# Altium PCB First32.PcbDoc
Units mil, origin at the board's own origin, x right, y up, seen from the top; angles counter-clockwise.
Board outline 1980 x 1970 mil, 2 copper layers (Top Layer, Bottom Layer); 42 components, 70 nets, 235 pads, 75 vias.
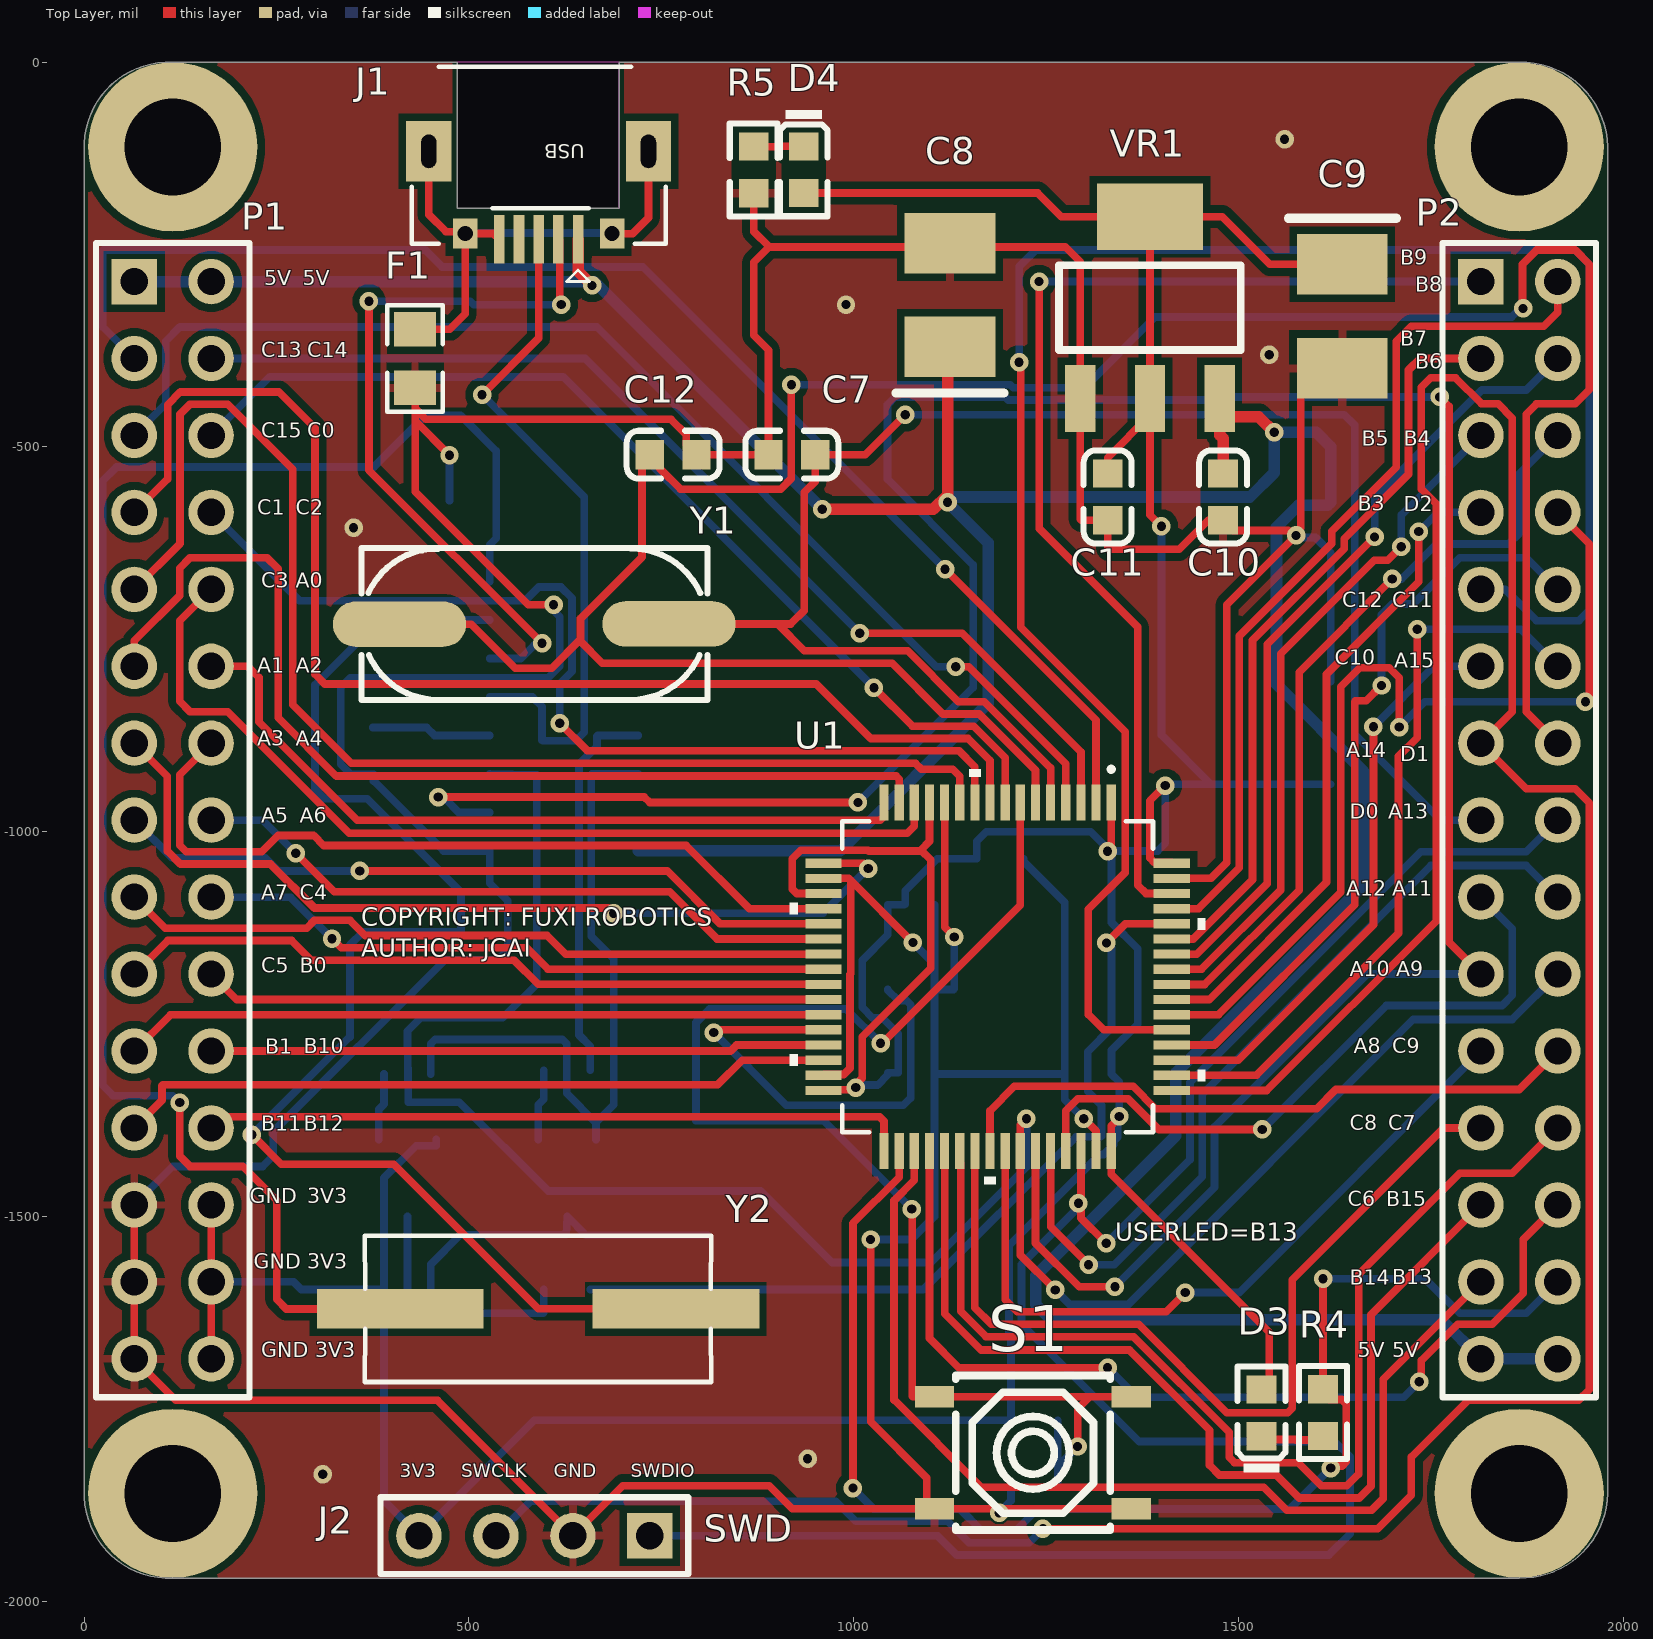
[diagram p0: Top Layer view]
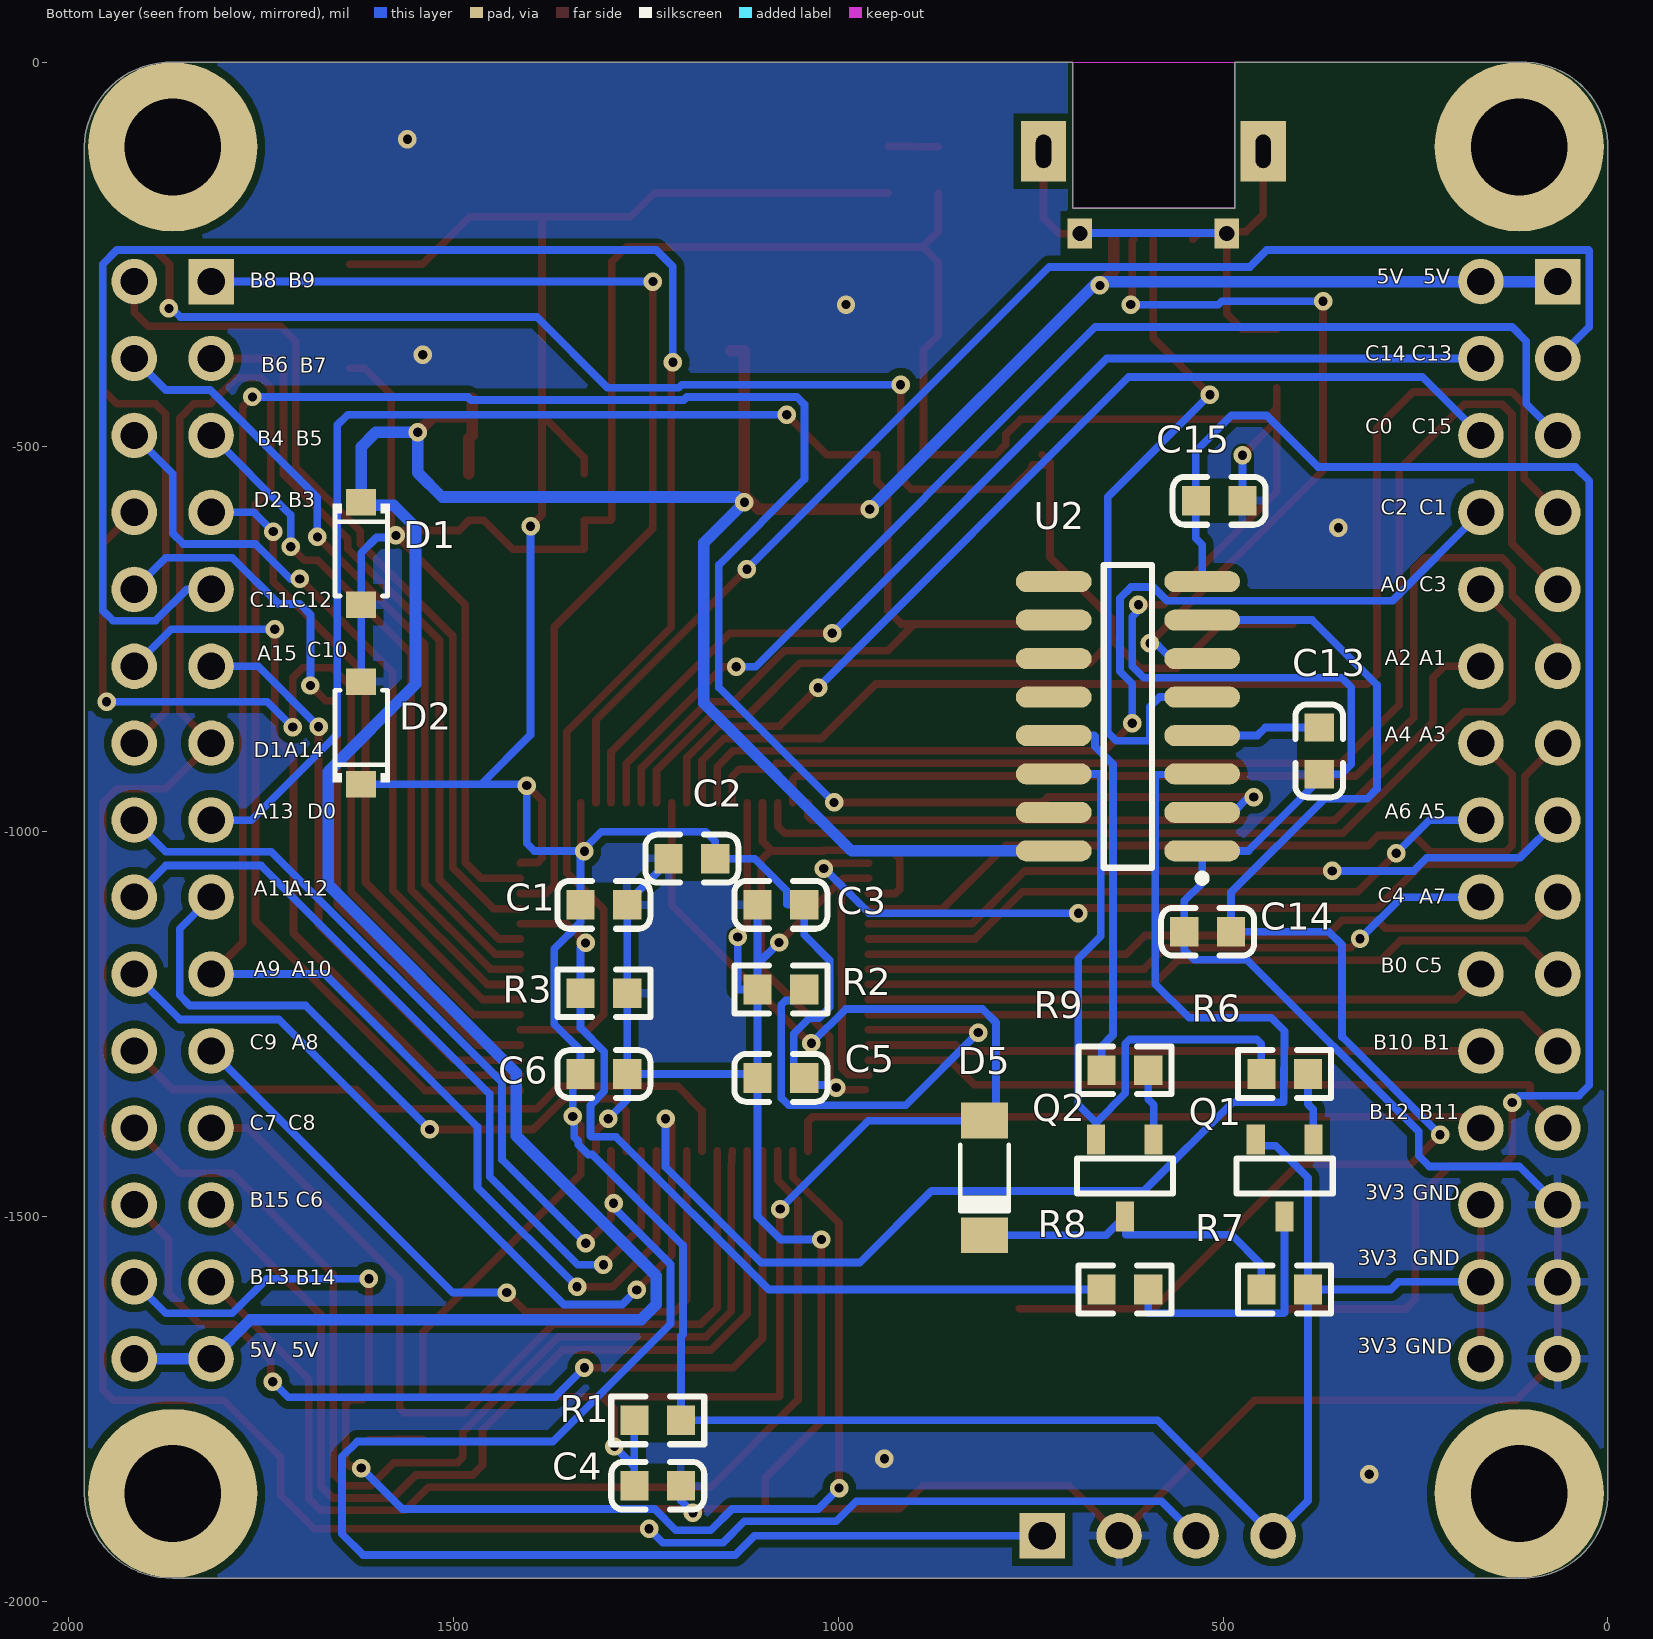
[diagram p1: Bottom Layer view, seen from below]
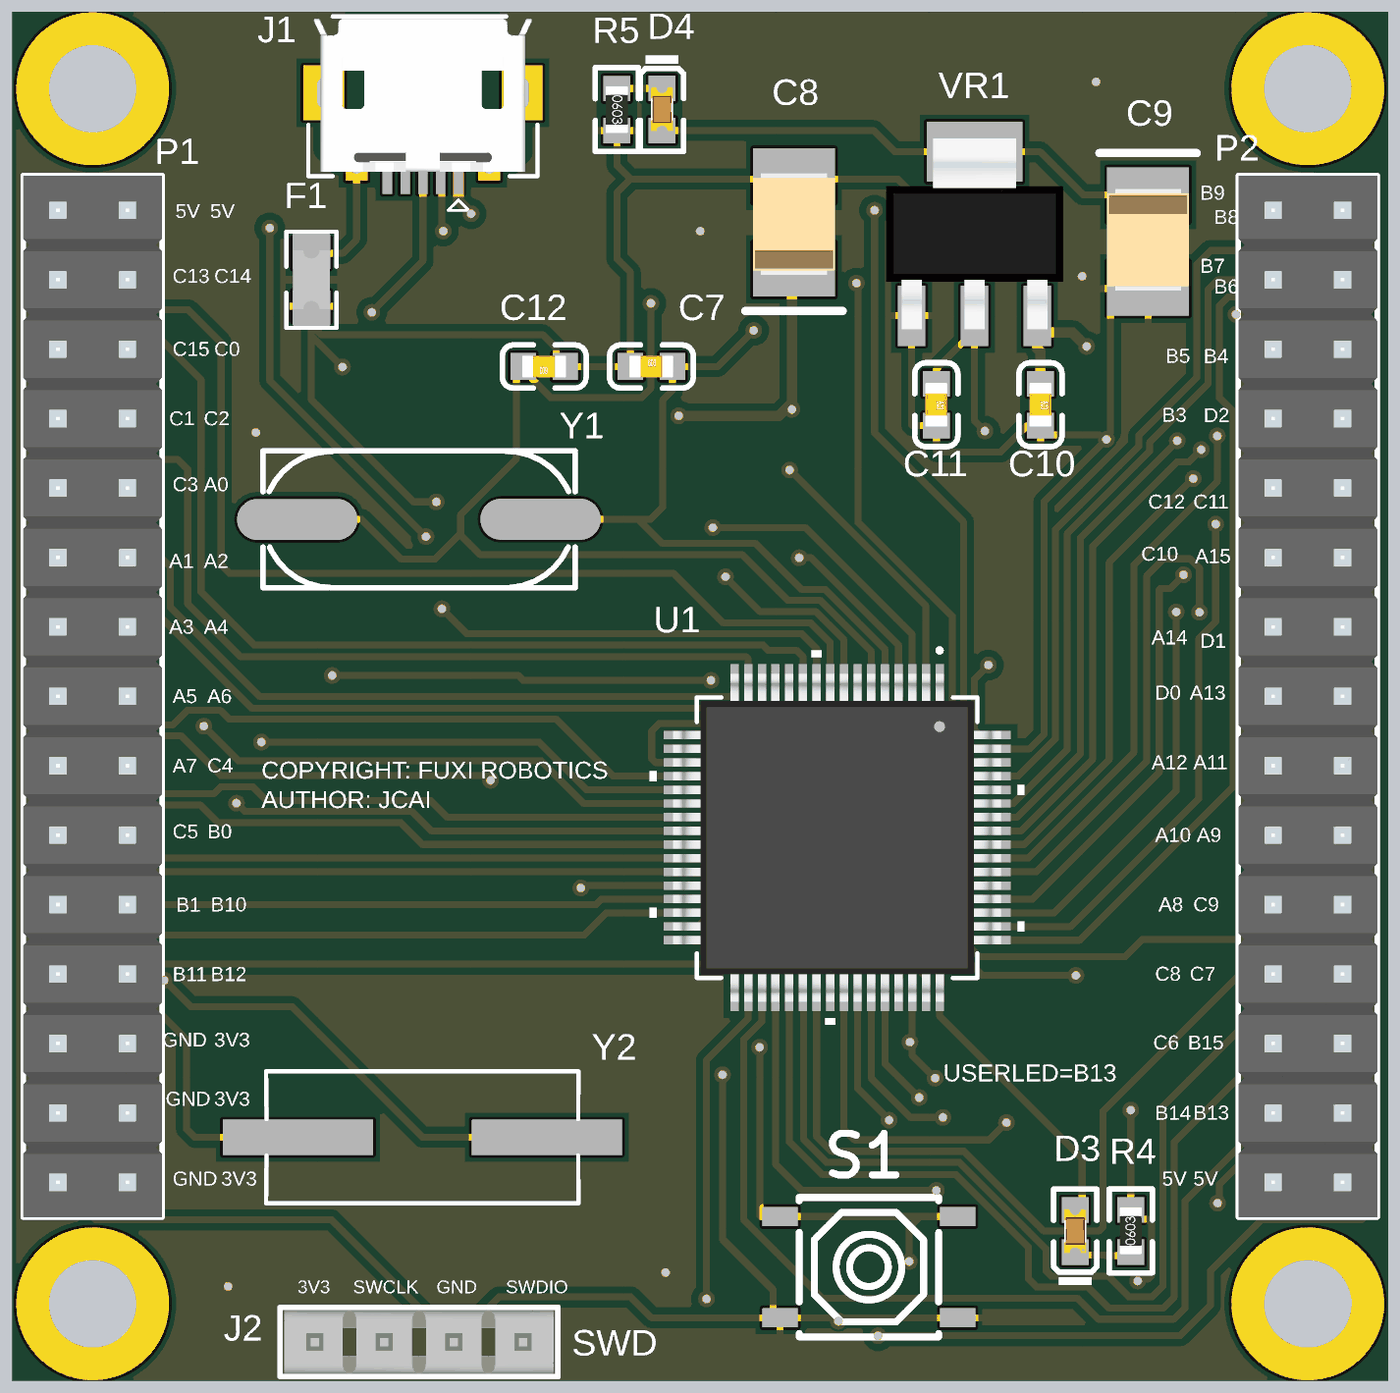
[diagram p2: 3D render of the assembled board from above, using the file's embedded part models]
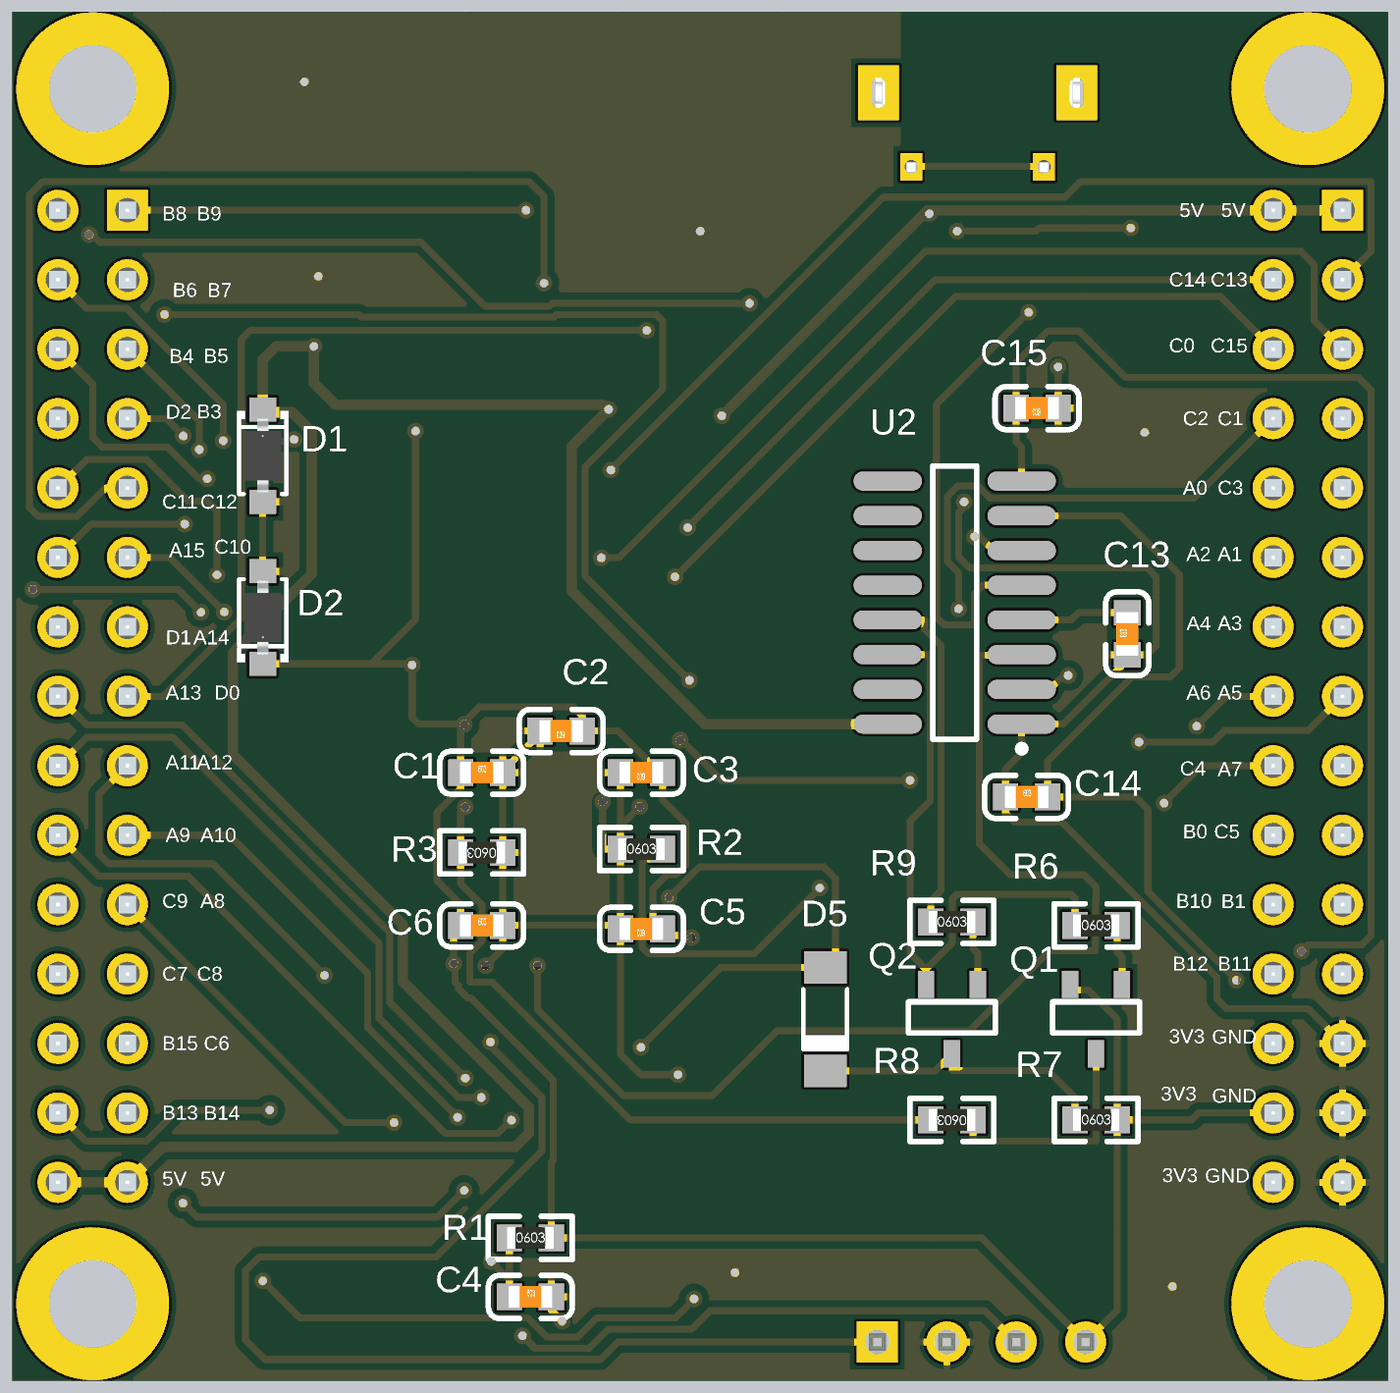
[diagram p3: 3D render of the assembled board from below, using the file's embedded part models]

## Layer stack, top to bottom
Top Solder: solder mask 0.4, Solder Resist, Dk 3.5
Top Layer: signal copper 1.4
Dielectric 1: dielectric 12.6, FR-4, Dk 4.8
Bottom Layer: signal copper 1.4
Bottom Solder: solder mask 0.4, Solder Resist, Dk 3.5

## Board outline
0,-1865 0,-105 cw(c110,-110) 115,0 485,0 485,-190 695,-190 695,0 1865,0 cw(c1867.5,-112.5) 1980,-110 1980,-1860 cw(c1867.5,-1857.5) 1865,-1970 115,-1970 cw(c110,-1860)
cut-out: 695,0 485,0 485,-190 695,-190

## Design rules (kind name [scope] priority, off if disabled: settings)
Clearance [All] p1: gap=6 ignorepadtopadclearanceinfootprint=FALSE except(10: Arc-Poly Track-Poly SMDPad-Poly THPad-Poly Via-Poly Fill-Poly Poly-Poly)
HoleSize [All] p1: absolutevalues=TRUE maxlimit=200 minlimit=1 maxpercent=80.000 minpercent=20.000
HoleToHoleClearance [All] p1: gap=6 allowstackedmicrovias=TRUE
MinimumSolderMaskSliver [All] p1: minsoldermaskwidth=3
PolygonConnect [All] p1: thpad.connectstyle=Relief thpad.reliefconductorwidth=10 thpad.reliefentries=4 thpad.polygonreliefangle="90 Angle" thpad.airgapwidth=10 smdpad.connectstyle=Relief smdpad.reliefconductorwidth=10 smdpad.reliefentries=4 smdpad.polygonreliefangle="90 Angle" smdpad.airgapwidth=10 via.connectstyle=Direct via.reliefconductorwidth=10 via.reliefentries=4 via.polygonreliefangle="90 Angle" via.airgapwidth=10
RoutingVias [All] p1: holewidth=12 width=24 viastyle="Through Hole" minholewidth=1 minwidth=12 maxholewidth=13 maxwidth=27
SilkToSilkClearance [All] p1: silktosilkclearance=0
SilkToSolderMaskClearance [IsPad] p1: minsilkscreentomaskgap=0 clearancetoexposedcopper=TRUE
SolderMaskExpansion [All] p1: expansion=4 istentingtop=FALSE
Width Width_1 [InNet('5V')] p1: maxlimit=20 minlimit=10 preferedwidth=15
Width [All] p2: maxlimit=20 minlimit=5 preferedwidth=10
25 further rules are at their usual default settings.

## Components (designator, comment, footprint, x,y, rotation, side; value= is the part's Value field where it differs from the comment)
C1 "100nF (104) 10% 50V" 0603_C 1304.68,-1095 r180 bottom value=104
C2 "100nF (104) 10% 50V" 0603_C 1190.32,-1035 r0 bottom value=104
C3 "100nF (104) 10% 50V" 0603_C 1074.69,-1095 r0 bottom value=104
C4 "100nF (104) 10% 50V" 0603_C 1234.69,-1850 r180 bottom value=104
C5 "100nF (104) 10% 50V" 0603_C 1074.68,-1320 r0 bottom value=104
C6 "100nF (104) 10% 50V" 0603_C 1304.68,-1315 r180 bottom value=104
C7 "22pF (220) 5% 50V" 0603_C 919.69,-510 r0 top value=22pF
C8 "22uF(226) 10% 16V" CASE-B_3528 1125,-370 r90 top value=22uF
C9 "22uF(226) 10% 16V" CASE-B_3528 1635,-262.63 r270 top value=22uF
C10 "100nF (104) 10% 50V" 0603_C 1480,-565 r270 top value=104
C11 "100nF (104) 10% 50V" 0603_C 1330,-565 r270 top value=104
C12 "22pF (220) 5% 50V" 0603_C 765.32,-510 r180 top value=22pF
C13 "100nF (104) 10% 50V" 0603_C 375,-895 r90 bottom value=104
C14 "22pF (220) 5% 50V" 0603_C 520,-1130 r180 bottom value=22pF
C15 "22pF (220) 5% 50V" 0603_C 505,-570 r0 bottom value=22pF
D1 "5V" SOD-123 1620,-638.37 r270 bottom value=5.0V
D2 "5V" SOD-123 1620,-871.63 r90 bottom value=3.3V
D3 "蓝灯 0603" 0603_LED 1530,-1755.32 r90 top
D4 "红灯 0603" 0603_LED 935,-139.68 r270 top
D5 "LL4148" LL-34 810,-1450 r90 bottom
F1 "TLC-PSMD050" 0805_F 430,-385 r90 top value=500mA
J1 "USB-mrico" SMD-USB-micro_B 590.59,-115.83 r180 top
J2 "Header 4" "HDR 1X4" 735,-1915 r180 top value=SWD接口
P1 "Header 15X2" "HDR 2x15 2.54 mm" 65,-285 r270 top locked
P2 "Header 15X2" "HDR 2x15 2.54 mm" 1815,-285 r270 top locked
Q1 "S8550" SOT-23 457.4,-1400 r0 bottom
Q2 "S8050" SOT-23 665,-1400 r0 bottom
R1 "10K" 0603_R 1234.69,-1765 r180 bottom
R2 "10K" 0603_R 1074.69,-1205 r180 bottom
R3 "10K" 0603_R 1304.68,-1210 r0 bottom
R4 "1K" 0603_R 1610,-1755 r90 top
R5 "1K" 0603_R 870,-140 r270 top
R6 "1K" 0603_R 419.9,-1315 r180 bottom
R7 "10K" 0603_R 419.9,-1595 r180 bottom
R8 "1K" 0603_R 627.5,-1595 r0 bottom
R9 "1K" 0603_R 627.5,-1310 r180 bottom
S1 "RESET" SW-SMD-4*4 1232.95,-1807.16 r180 top
U1 "STM32F103RCT6" LQFP64-10x10mm 1187.05,-1188.62 r270 top
U2 "CH340G" SOP-16_150mil 623.54,-850 r0 bottom
VR1 "AMS1117-3.3" SOT-223 1385,-318.82 r270 top
Y1 "XTAL" HC-49SMD 584.8,-730.17 r0 top value=8M
Y2 "XTAL" HC-49S_L11.4-W4.8 589.8,-1620.17 r0 top value=12M

## Footprints (in the part's own frame and the unit in brackets; to place one, negate y for a bottom-side part, rotate by r counter-clockwise, add the part's x,y. Pads: shape width x height; smd on the part's side, far side on the other; paste and mask are expansions set on the pad)
0603_C [mm]
  rect 0.93x0.98 smd: 1(-0.77,0) 2(0.77,0)
  silkscreen extent -1.54,-0.79 1.54,0.79, body extent -0.8,-0.4 0.8,0.4, height 0.3
0603_LED [mm]
  rect 0.93x0.98 smd: A(0.77,0) K(-0.77,0)
  silkscreen extent -1.98,-0.79 1.54,0.79, body extent -0.8,-0.4 0.8,0.4, height 0.6
0603_R [mm]
  rect 0.93x0.98 smd: 1(-0.77,0) 2(0.77,0)
  silkscreen extent -1.54,-0.79 1.54,0.79, body extent -0.85,-0.4 0.85,0.4, height 0.56
0805_F [mil]
  rect 44.59x54.21 smd: 1(-38.04,0) 2(38.04,0)
  silkscreen extent -69,-36 69,36, body extent -42,-27 42,27, height 26
CASE-B_3528 [mm]
  rect 2x3 smd: 1(0,0) 2(3.429,0)
  silkscreen extent -1.52,-1.78 -1.52,1.78, body extent -0.2,-1.5 3.51,1.5, height 2.16
HC-49S_L11.4-W4.8 [mm]
  rect 5.5x1.3 smd: 1(4.553,0) 2(-4.553,0)
  silkscreen extent -5.71,-2.41 5.71,2.41
HC-49SMD [mm]
  oval 4.4x1.5 smd: 1(-4.45,-0.004) 2(4.45,0.004)
  silkscreen extent -5.7,-2.5 5.72,2.5, body extent -7.5,-2.25 7.5,2.25, height 4.22
"HDR 1X4" [mm] "Connector; Header; 4 Position"
  rect 1.5x1.5 hole 0.9: 1(0,0)
  round 1.5 hole 0.9: 2(2.54,0) 3(5.08,0) 4(7.62,0)
  silkscreen extent -1.27,-1.27 8.89,1.27, body extent -1.12,-1.17 8.74,1.17, height 10.03
"HDR 2x15 2.54 mm" [mm]
  rect 1.5x1.5 hole 0.9: 1(0,0)
  round 1.5 hole 0.9: 2(0,2.54) 3(2.54,0) 4(2.54,2.54) 5(5.08,0) 6(5.08,2.54) 7(7.62,0) 8(7.62,2.54) 9(10.16,0) 10(10.16,2.54) 11(12.7,0) 12(12.7,2.54) 13(15.24,0) 14(15.24,2.54) 15(17.78,0) 16(17.78,2.54) 17(20.32,0) 18(20.32,2.54) 19(22.86,0) 20(22.86,2.54) 21(25.4,0) 22(25.4,2.54) 23(27.94,0) 24(27.94,2.54) 25(30.48,0) 26(30.48,2.54) 27(33.02,0) 28(33.02,2.54) 29(35.56,0) 30(35.56,2.54)
  silkscreen extent -1.27,-1.27 36.83,3.81, body extent -1.27,-1.27 36.83,3.81, height 8.54
LL-34 [mm]
  rect 1.185x1.566 smd: 1(1.893,0) 2(-1.893,0)
  silkscreen extent -1.1,-0.8 1.1,0.8, body extent -1.88,-0.8 1.82,0.8, height 1.59
LQFP64-10x10mm [mil]
  rect 47x12 smd paste+0 mask+0: 1(-226.38,147.64) 2(-226.38,127.95) 3(-226.38,108.27) 4(-226.38,88.58) 5(-226.38,68.9) 6(-226.38,49.21) 7(-226.38,29.53) 8(-226.38,9.84) 9(-226.38,-9.84) 10(-226.38,-29.53) 11(-226.38,-49.21) 12(-226.38,-68.9) 13(-226.38,-88.58) 14(-226.38,-108.27) 15(-226.38,-127.95) 16(-226.38,-147.64) 33(226.38,-147.64) 34(226.38,-127.95) 35(226.38,-108.27) 36(226.38,-88.58) 37(226.38,-68.9) 38(226.38,-49.21) 39(226.38,-29.53) 40(226.38,-9.84) 41(226.38,9.84) 42(226.38,29.53) 43(226.38,49.21) 44(226.38,68.9) 45(226.38,88.58) 46(226.38,108.27) 47(226.38,127.95) 48(226.38,147.64)
  rect 12x47 smd paste+0 mask+0: 17(-147.64,-226.38) 18(-127.95,-226.38) 19(-108.27,-226.38) 20(-88.58,-226.38) 21(-68.9,-226.38) 22(-49.21,-226.38) 23(-29.53,-226.38) 24(-9.84,-226.38) 25(9.84,-226.38) 26(29.53,-226.38) 27(49.21,-226.38) 28(68.9,-226.38) 29(88.58,-226.38) 30(108.27,-226.38) 31(127.95,-226.38) 32(147.64,-226.38) 49(147.64,226.38) 50(127.95,226.38) 51(108.27,226.38) 52(88.58,226.38) 53(68.9,226.38) 54(49.21,226.38) 55(29.53,226.38) 56(9.84,226.38) 57(-9.84,226.38) 58(-29.53,226.38) 59(-49.21,226.38) 60(-68.9,226.38) 61(-88.58,226.38) 62(-108.27,226.38) 63(-127.95,226.38) 64(-147.64,226.38)
  silkscreen extent -273,-270 270,270, body extent -236,-236 236,236, height 63
SMD-USB-micro_B [mm] "micro型USB ，5.7*7.8*2.5mm"
  rect 0.35x1.6 smd: 1(-1.3,2.9) 2(-0.65,2.9) 3(0,2.9) 4(0.65,2.9) 5(1.3,2.9)
  rect 1.5x2 hole 0.5 slot 1.1 at 90 deg: 5(-3.625,0) 5(3.625,0)
  rect 0.8x1 hole 0.5: 5(-2.425,2.71) 5(2.425,2.71)
  silkscreen extent -4.19,-2.79 4.19,4.3, body extent -4,-2.71 4,2.89, height 2.8
SOD-123 [mm]
  rect 0.88x0.99 smd: 1(-1.693,0) 2(1.693,0)
  silkscreen extent -1.63,-0.94 1.41,0.94, body extent -1.35,-0.67 1.35,0.67, height 0.99
SOP-16_150mil [mm] "SOIC, 16-Leads, Body 9.9x3.9mm, Pitch 1.27mm, IPC Low Density"
  oval 2.5x0.7 smd: 1(-2.45,4.445) 2(-2.45,3.175) 3(-2.45,1.905) 4(-2.45,0.635) 5(-2.45,-0.635) 6(-2.45,-1.905) 7(-2.45,-3.175) 8(-2.45,-4.445) 9(2.45,-4.445) 10(2.45,-3.175) 11(2.45,-1.905) 12(2.45,-0.635) 13(2.45,0.635) 14(2.45,1.905) 15(2.45,3.175) 16(2.45,4.445)
  silkscreen extent -2.57,-5 0.8,5.47, body extent -2,-5 2,5, height 1.75
SOT-23 [mm] "1,3,2脚序，适合TL431等"
  rect 0.6x1 smd: 1(-1.9,0) 2(0,0) 3(-0.95,2.54)
  silkscreen extent -2.54,0.64 0.63,1.78, body extent -2.39,-0.05 0.61,2.59, height 1.08
SOT-223 [mm]
  rect 2.2x1 smd: 1(3,-2.3) 2(3,0) 3(3,2.3)
  rect 2.2x3.5 smd: 2(-3,0)
  silkscreen extent -1.4,-3 1.4,3, body extent -3.49,-3.24 3.49,3.24, height 1.64
SW-SMD-4*4 [mm]
  rect 1.3x0.7 smd: 1(-3.25,-1.85) 1(3.25,-1.85) 2(-3.25,1.85) 2(3.25,1.85)
  silkscreen extent -2.55,-2.55 2.55,2.55, body extent -3.2,-2.6 3.2,2.6, height 1.5

## Part data
C1 C2 C3 C4 C5 C6 C10 C11 C13: library part "0603 100nF (104) 10% 50V", "贴片电容", Package=0603, SuppliersPartNumber=C14663, ComponentLink1Description=供应商链接, ComponentLink1URL=http://www.szlcsc.com/product/details_15331.html, Supplier=LC
C7 C12 C14 C15: library part "0603 22pF (220) 5% 50V", "贴片电容", Package=0603, SuppliersPartNumber=C1653, ComponentLink1Description=供应商链接, ComponentLink1URL=http://www.szlcsc.com/product/details_2005.html, Supplier=LC
C8 C9: library part "3528 22uF(226) 10% 16V", "钽电容", Package=Case-B_3528, SuppliersPartNumber=C129568, ComponentLink1Description=供应商链接, ComponentLink1URL=https://item.szlcsc.com/140854.html, Supplier=LC
D1 D2: library part Diode-Zener, "稳压二极管"
D3: library part "0603 蓝灯", "发光二极管", Package=0603, SuppliersPartNumber=C72044, ComponentLink1Description=供应商链接, ComponentLink1URL=https://item.szlcsc.com/73153.html, Supplier=LC
D4: library part "0603 红灯", "发光二极管", Package=0603, SuppliersPartNumber=C72044, ComponentLink1Description=供应商链接, ComponentLink1URL=https://item.szlcsc.com/73153.html, Supplier=LC
D5: BOM_JLCPCB Part Class="Basic Part", BOM_Manufacturer=SEMTECH, BOM_Manufacturer Part=LL4148, BOM_Supplier=LCSC, BOM_Supplier Part=C9808, ComponentLink1Description=供应商链接, ComponentLink1URL=https://item.szlcsc.com/10338.html, spicePre=D, spiceSymbolName=LL4148
F1: library part Fuse, "保险", BOM_JLCPCB Part Class="Extended Part", BOM_Manufacturer="TLC Electronic", Package=0805, BOM_Manufacturer Part=TLC-PSMD050, BOM_Supplier=LCSC, BOM_Supplier Part=C261942, ComponentLink1Description=供应商链接, ComponentLink1URL=https://item.szlcsc.com/253417.html, Contributor=LCSC, spicePre=U, spiceSymbolName=TLC-PSMD050
J1: library part Micro_USB_B
J2: "Header, 4-Pin", LatestRevisionDate=17-Jul-2002, LatestRevisionNote="Re-released for DXP Platform.", Publisher="Altium Limited"
P1 P2: "Header, 15-Pin, Dual row", Package="Through Hole, 2.54mm", SuppliersPartNumber=C56496, ComponentLink1Description=供应商链接, ComponentLink1URL=https://item.szlcsc.com/57525.html, Publisher="Altium Limited"
Q1: "PNP三极管", Package=SOT23, SuppliersPartNumber=C727136, ComponentLink1Description="Manufacturer Link", ComponentLink1URL=https://item.szlcsc.com/774241.html, Publisher="Altium Limited"
Q2: "NPN三极管", Package=SOT-23, SuppliersPartNumber=C397180, ComponentLink1Description="Manufacturer Link", ComponentLink1URL=https://item.szlcsc.com/379088.html
R1 R2 R3 R7: library part "0603 10KΩ (1002) 1%", "贴片电阻", Package=0603, SuppliersPartNumber=C25804, ComponentLink1Description=供应商链接, ComponentLink1URL=http://www.szlcsc.com/product/details_26547.html, Supplier=LC
R4 R5 R6 R8 R9: library part "0603 1KΩ (1K) 1%", "贴片电阻", Package=0603, SuppliersPartNumber=C727989, ComponentLink1Description=供应商链接, ComponentLink1URL=https://item.szlcsc.com/775304.html, Supplier=LC
S1: library part SW-PB-4P, "4脚按键", SuppliersPartNumber=C530667, ComponentLink1Description=供应商链接, ComponentLink1URL=https://item.szlcsc.com/551001.html, PackageReference=4*4, Publisher=LC
U1: "No Description Available", Built_By=EMA_UL_Team, Copyright="Copyright (C) 2018 Accelerated Designs. All rights reserved", Manufacturer_Part_Number=STM32F103RCT6, RefDes=RefDes, SourceLibrary=Updates_to_database_2020-10-19, Type=DEV, Vendor=STMicroelectronics
U2: Package=SOP-16_150mil, SuppliersPartNumber=C14267, ComponentLink1Description=供应商链接, ComponentLink1URL=https://item.szlcsc.com/14927.html
VR1: library part "SOT-223 AMS1117-3.3", "低压差线性稳压(LDO)", Package=SOT-223, SuppliersPartNumber=C6186, ComponentLink1Description=供应商链接, ComponentLink1URL=http://www.szlcsc.com/product/details_6652.html, Supplier=LC
Y1: "Crystal Oscillator", LatestRevisionDate=17-Jul-2002, LatestRevisionNote="Re-released for DXP Platform.", PackageDescription="Crystal, Thru-Hole; 2 Leads; Body 3.1 x 8.2 mm (Dia.xH)", PackageReference=R38, Published=8-Jun-2000, Publisher="Altium Limited"
Y2: library part XTAL_12M, "Crystal Oscillator", LatestRevisionDate=17-Jul-2002, LatestRevisionNote="Re-released for DXP Platform.", PackageDescription="Crystal, Thru-Hole; 2 Leads; Body 3.1 x 8.2 mm (Dia.xH)", PackageReference=R38, Published=8-Jun-2000, Publisher="Altium Limited"

## Free pads (board coordinates)
  round 220 hole 126: 0(115,-1860) 0(115,-110) 0(1865,-1860) 0(1865,-110)

## Via types
v1: diameter 24, hole 12, Top Layer to Bottom Layer, 75 vias

## Nets (pads, with @x,y where several pads share a name; then routed paths per layer and width w, separated by ;. In a path a pad name is that pad's centre, name@x,y a point inside that pad or via, vN(x,y) a via of type N, cw(c..) or ccw(c..) an arc to the next point about the centre after c; other vN are vias at no path point)
3V3: C1.1 C2.1 C3.1 C5.1 C6.1 C9.1 C11.1 D2.1 D3.A D4.A J2.4 P1.26 P1.28 P1.30 Q1.2 R1.2 R7.2 U1.1 U1.13 U1.19 U1.32 U1.48 U1.64 VR1.2 | length 6735.8
  Top Layer w10: P1.30 P1.28 P1.26 ; D4.A 1239.3,-170 1270,-200.7 VR1.2@1385,-200.7 ; U1.19 925.86,-1080.35 920,-1074.5 920,-1035 931.02,-1023.98 1018.6,-1023.98 1019.61,-1025 1088.52,-1025 ; U1.32@965,-1335.26 996.07,-1335.26 998.79,-1332.53 v1(1002.58,-1332.53) 1002.58,-1328.74 1011.17,-1320.15 1011.17,-1266.3 1100,-1177.47 1100,-1036.48 1087.5,-1023.98 1086.98,-1023.98 1098.47,-1012.5 U1.13 ; v1(1330,-1025.31) 1330,-1021.53 1334.69,-1016.84 U1.1 ; C11.1 1330,-514 VR1.2@1385,-459 ; v1(1345,-1370) 1345,-1372.01 1334.69,-1382.32 1334.69,-1420 1334.69,-1445.36 1540,-1650.68 D3.A@1540,-1729.37 ; v1(1400,-603) 1385,-588 VR1.2@1385,-459 ; v1(1405,-940) 1385,-960 1385,-1034.12 1390.86,-1039.98 1412.43,-1039.98 U1.64 ; C9.1 1540.93,-262.63 1479,-200.7 VR1.2@1385,-200.7 ; VR1.2@1385,-459 1385,-436.92 VR1.2@1385,-200.7
  Bottom Layer w10: P1.28 272,-1585 282,-1595 R7.2 ; Q1.2 457.4,-1408 431.58,-1408 389.58,-1450 R7.2 ; v1(1002.58,-1332.53) 1006.37,-1332.53 1009.61,-1329.29 1031.06,-1329.29 1044.37,-1315.98 1044.37,-1313.33 1058,-1313.33 1058,-1262.5 1037.71,-1242.21 1025,-1242.21 1011,-1228.21 1011,-1167.37 1044.37,-1134 C3.1 1065.86,-1095 1066.86,-1094 1066.86,-1076.64 1108.5,-1035 C2.1 1160,-1012.5 1172.5,-1000 1308,-1000 1330,-1022 v1(1330,-1025.31) 1330.31,-1025 1395,-1025 1405,-1015 v1(1405,-940) 1406.73,-938.27 1464,-938.27 ; v1@1335,-1027 C1.1 1335,-1118 1369,-1152 1369,-1250 1335,-1284 C6.1 1345,-1325 v1@1345,-1365 ; v1(1400,-603) 1400,-874.27 1464,-938.27 ; D2.1 1464,-938.27 ; R7.2 389.58,-1869.58 J2.4 585,-1765 R1.2 1204.37,-1655.5 1201.96,-1653.09 1201.96,-1537.54 1319.98,-1419.52 1325,-1419.52 1338,-1406.52 1338,-1402 ; 1338,-1402 1343,-1397 ; 1338,-1402 1343,-1397 ; 1343,-1397 v1@1343,-1367 ; 1343,-1397 v1@1343,-1367 ; v1@1343,-1367 v1@1345,-1365 ; v1@1343,-1367 v1@1345,-1365
5V: C8.1 C10.1 D1.1 J1.1 P1.1 P1.2 P2.29 P2.30 U2.16 VR1.3 | length 5137.5
  Top Layer w15: J1.1 641.77,-271.77 v1(660,-290) ; v1(959,-581) 1103.5,-581 v1@1122,-562.5 ; v1(1122,-571.73) v1@1122,-562.5 ; C8.1@1140,-375 1122,-375 v1@1122,-562.5 ; VR1.3 VR1.3@1475.55,-461 ; C10.1 1480,-489 1475.55,-484.55 VR1.3@1475.55,-461 ; v1(1546.44,-481) 1526.44,-461 VR1.3@1475.55,-461
  Bottom Layer w15: P1.1 P1.2 663,-285 v1(959,-581) ; U2.16 982.8,-1025 1175,-832.8 1175,-624.73 v1(1122,-571.73) 1124.44,-571.73 1131.17,-565 1515,-565 1546.44,-533.56 v1(1546.44,-481) 1601,-481 1620,-500 1620,-565 D1.1 1615.81,-575.93 1578.01,-575.93 1549.5,-604.44 1549.5,-808.5 1663,-922 1663,-1069 1418.5,-1313.5 1418.5,-1395.03 1236.46,-1577.07 1236.46,-1614.46 1256,-1634 1764,-1634 P2.29 P2.30
BOOT0: R3.2 R8.2 U1.60 | length 1116
  Top Layer w10: v1(1328.5,-1144.5) 1353.28,-1119.72 U1.60
  Bottom Layer w10: R8.2 1090.5,-1595 1289,-1396.5 1321,-1396.5 1322,-1395.5 1322,-1355.5 1304,-1337.5 1304,-1286 1335,-1255 R3.2 1335,-1151 v1(1328.5,-1144.5)
BOOT1: R2.2 U1.28 | length 602.6
  Top Layer w10: v1(818,-1261) 821.48,-1257.52 U1.28
  Bottom Layer w10: v1(818,-1261) 912.53,-1355.53 1064.47,-1355.53 1074,-1346 1074,-1225.15 1068.14,-1219.29 1057.68,-1219.29 1044.37,-1205.98 R2.2
DTR: R9.1 U2.13 | length 503.8
  Bottom Layer w10: R9.1 657.81,-1279 643,-1264.19 643,-912.5 666.49,-889.01 666.49,-876 667.49,-875 U2.13
GND: C1.2 C2.2 C3.2 C4.2 C5.2 C6.2 C7.1 C8.2 C9.2 C10.2 C11.2 C12.1 C13.1 C14.1 C15.1 D1.2 D2.2 F1.1 J2.2 P1.25 P1.27 P1.29 R2.1 R3.1 R5.2 S1.2 U1.12 U1.18 U1.31 U1.47 U1.63 U2.1 VR1.1 | length 8860
  Top Layer w10: P1.25 P1.27 P1.29 119,-1739 459,-1739 J2.2 700,-1850 890,-1850 920,-1880 S1.2@1095,-1880 ; F1.1 430,-450 ; v1(474.68,-510.68) 430,-466 ; v1(610,-705) 577,-705 430,-558 430,-466 ; R5.2 870,-220 890,-240 ; U1.31 961.67,-1315.57 987.04,-1315.57 995.17,-1307.45 995.17,-1185.64 996,-1184.81 996,-1063 ; U1.18 993.67,-1060.67 996,-1063 ; v1(1022,-1530) 1022,-1767 1095,-1840 S1.2@1095,-1880 ; v1(1077,-1144) 996,-1063 ; U1.12 1118.15,-1124.35 v1(1130.65,-1136.85) ; v1(1189,-1885) v1@1184,-1880 ; v1(1299,-1373) 1315,-1389 U1.47 ; S1.2@1360.9,-1880 1232,-1880 1189,-1880 v1@1184,-1880 ; U1.63 1464.33,-1060.67 1485,-1040 1485,-705 v1(1575,-615) ; C9.2 1615.31,-397.63 1580.94,-432 1580.94,-605.27 1575,-611.21 v1(1575,-615) ; 430,-466 430,-450 ; 430,-450 444,-464 762.5,-464 782.32,-483.82 782.32,-496.69 C12.1 C7.1 889.37,-374.37 870,-355 870,-260 890,-240 ; 890,-240 1140,-240 1275,-240 1294.45,-259.45 VR1.1 1294.45,-594 1295.76,-595.31 C11.2 1330,-632 1331,-633 1423,-633 1460.69,-595.31 C10.2 1493.31,-608.62 1564.83,-608.62 1571.21,-615 v1(1575,-615) ; S1.2@1095,-1880 1105,-1880 v1@1184,-1880
  Bottom Layer w10: P1.25 115,-1435 232.07,-1435 245.83,-1421.25 245.83,-1389.67 468.95,-1166.55 537.5,-1166.55 550.32,-1153.74 C14.1 550.32,-1090 527.09,-1066.77 U2.1 467,-1025 376,-934 376,-925.32 C13.1 346.26,-925.32 333.45,-912.5 333.45,-812.5 345.95,-800 603,-800 618,-785 618,-720.86 612.68,-715.54 612.68,-707.68 v1(610,-705) ; C15.1 v1(474.68,-510.68) ; v1(1022,-1530) 1075,-1530 1105,-1500 C5.2@1105,-1315 ; v1(1077,-1144) 1105,-1172 ; C3.2 1105,-1172 ; v1(1130.65,-1136.85) 1130.65,-1204 1129.65,-1205 R2.1 ; v1(1189,-1885) 1204.37,-1869.63 C4.2 ; C2.2 1220.63,-1038.26 1274.37,-1092 C1.2 R3.1 C6.2 ; v1(1299,-1373) 1274.37,-1348.37 C6.2 ; v1(1575,-615) 1577.68,-617.68 1600.18,-617.68 1620,-637.5 D1.2 D2.2 ; C5.2@1105,-1315 C6.2 ; C5.2@1105,-1315 R2.1 ; R2.1 1105,-1172
  other v1: 310,-1835 940,-1815 350,-605 1540,-380 990,-315 1560,-100
NetC13_2: C13.2 U2.4 | length 156.4
  Bottom Layer w10: C13.2 445,-864.69 455.31,-875 U2.4
NetC14_2: C14.2 U2.7 Y2.1 | length 1785.6
  Top Layer w10: v1(218,-1394) 256,-1432 402,-1432 590,-1620 Y2.1@765,-1620
  Bottom Layer w10: v1(218,-1394) 345.3,-1266.7 345.3,-1147.2 362.5,-1130 C14.2 489.69,-1078.69 368,-957 312.5,-957 300,-944.5 300,-809 384,-725 U2.7
NetC15_2: C15.2 U2.8 Y2.2 | length 2151.6
  Top Layer w10: v1(124,-1352) 124,-1421.5 137.5,-1435 206,-1435 250,-1479 250,-1607.84 262.5,-1620.34 Y2.2@414.61,-1620.34
  Bottom Layer w10: v1(124,-1352) 115,-1343 37.5,-1343 24,-1329.5 24,-544 42,-526 376.5,-526 443.5,-459 489,-459 535.31,-505.31 C15.2 535.31,-618.77 527.09,-627 U2.8
NetD3_K: D3.K R4.1 | length 70.3
  Top Layer w10: D3.K@1540,-1790 1574,-1790 1574.63,-1790.63 R4.1@1610,-1790.63
NetD4_K: D4.K R5.1 | length 65.1
  Top Layer w10: R5.1 902,-109.69 902.32,-109.37 D4.K
NetD5_2: D5.2 Q2.3 R7.1 | length 441.4
  Bottom Layer w10: R7.1 450.21,-1562.5 488.71,-1524 626.6,-1524 Q2.3 652.11,-1524.51 D5.2
NetF1_2: F1.2 J1.5 | length 699.4
  Top Layer w10: F1.2 475,-346.96 495.12,-326.84 J1.5@495.12,-222.52 ; J1.5@447.87,-115.83 447.87,-197.87 470.23,-220.23 492.83,-220.23 J1.5@495.12,-222.52 ; J1.5@539.41,-230 531.93,-222.52 J1.5@495.12,-222.52 ; J1.5@686.06,-222.52 686.06,-223 712.5,-223 733.31,-202.19 J1.5@733.31,-115.83
  Bottom Layer w10: J1.5@495.12,-222.52 495.12,-222 686.06,-222 J1.5@686.06,-222.52
NetJ1_2: J1.2 U2.6 | length 952.3
  Top Layer w10: v1(370,-310.5) 370,-530 v1(595,-755) ; J1.2 618.07,-231.89 618.07,-313.07 v1(620,-315)
  Bottom Layer w10: v1(370,-310.5) 501.59,-310.5 506.09,-315 v1(620,-315) ; U2.6 567.27,-775 584.59,-757.68 592.32,-757.68 v1(595,-755)
NetJ1_3: J1.3 U2.5 | length 902.9
  Top Layer w10: v1(517,-432) 590.59,-358.41 J1.3
  Bottom Layer w10: v1(517,-432) 650,-565 650,-870.61 638.61,-882 596,-882 595,-881 595,-837.5 582.5,-825 U2.5
NetQ1_1: Q1.1 R6.2 | length 87.9
  Bottom Layer w10: Q1.1 382.6,-1361 389.58,-1354.01 R6.2
NetQ1_3: Q1.3 R8.1 | length 333
  Bottom Layer w10: Q1.3 420,-1625 421,-1626 596.19,-1626 597.19,-1625 R8.1
NetQ2_1: Q2.1 R9.2 | length 92.9
  Bottom Layer w10: Q2.1 590.2,-1354.8 597.18,-1347.82 R9.2
PA0: P1.10 U1.14 | length 1222.6
  Top Layer w10: P1.10 124,-726 124,-830.5 137.5,-844 186.37,-844 344.37,-1002 1069.5,-1002 1078.78,-992.72 U1.14
PA1: P1.11 U1.15 | length 1355.7
  Top Layer w10: P1.11 65,-752 124,-693 124,-657.5 137.5,-644 237.5,-644 252,-658.5 252,-852 327.74,-927.74 1055.15,-927.74 1059.1,-931.69 U1.15
PA2: P1.12 U1.16 | length 1010.6
  Top Layer w10: P1.12 212.5,-785 227,-799.5 227,-857 355,-985 1034.15,-985 1039.41,-979.74 U1.16
PA3: P1.13 U1.17 | length 1188.1
  Top Layer w10: P1.13 108,-928 108,-1025 125,-1042 242,-1042 299.2,-1099.2 681.2,-1099.2 v1(688,-1106) ; U1.17 1012.97,-1040.98 1018.96,-1046.97 v1(1018.96,-1047.99)
  Bottom Layer w10: v1(688,-1106) 959.98,-1106 1017.99,-1047.99 v1(1018.96,-1047.99)
PA4: P1.14 U1.20 | length 1037.9
  Top Layer w10: P1.14 124,-926 124,-1017.54 132.46,-1026 230.89,-1026 252.03,-1004.86 298.03,-1004.86 311.18,-1018 782.54,-1018 864.58,-1100.04 U1.20
PA5: P1.15 U1.21 | length 951.5
  Top Layer w10: v1(358,-1051) 757.5,-1051 826.22,-1119.72 U1.21
  Bottom Layer w10: P1.15 114,-1034 235.03,-1034 252.03,-1051 v1(358,-1051)
PA6: P1.16 U1.22 | length 859.6
  Top Layer w10: v1(275,-1028) 325,-1078 761,-1078 822.41,-1139.41 U1.22
  Bottom Layer w10: P1.16 232,-985 v1(275,-1028)
PA7: P1.17 U1.23 | length 934.9
  Top Layer w10: P1.17 105.53,-1125.53 288.97,-1125.53 299.3,-1115.2 345.3,-1115.2 365.1,-1135 601.52,-1135 625.61,-1159.09 U1.23
PA8: P2.21 U1.41 | length 958.4
  Top Layer w10: U1.41 1196.89,-1608.39 1212.5,-1624 1406,-1624 v1(1431,-1599)
  Bottom Layer w10: v1(1431,-1599) 1501,-1599 P2.21
PA9: P2.20 U1.42 U2.3 | length 2705.9
  Top Layer w10: v1(1224.5,-1373) 1216.58,-1380.92 U1.42 1216.58,-1550.12 v1(1261.96,-1595.5)
  Bottom Layer w10: U2.3 588,-926 588,-1198 544,-1242 437.5,-1242 420,-1259.5 421,-1351.5 487.5,-1351.5 603,-1467 879,-1467 972,-1560 1100.34,-1560 1224.5,-1435.84 v1(1224.5,-1373) ; v1(1261.96,-1595.5) 1280.96,-1614.5 1356.63,-1614.5 1727.13,-1244 1856,-1244 P2.20
PA10: P2.19 U1.43 U2.2 | length 3682.8
  Top Layer w10: v1(460,-955) 727.91,-955 734.91,-962 v1(1005.5,-962) ; U1.43 1236.26,-1534.67 1293.09,-1591.5 v1(1339.5,-1591.5) ; v1(1761.5,-435) 1774,-447.5 1774,-1144 P2.19
  Bottom Layer w10: v1(460,-955) 462.68,-957.68 469.58,-957.68 486.9,-975 U2.2 ; v1(1005.5,-962) 1006,-962 1155.5,-812.5 1155.5,-653.5 1044,-542 1044,-444.86 1053.86,-435 1196.9,-435 1200.9,-439 1477.31,-439 1481.31,-435 v1(1761.5,-435) ; v1(1339.5,-1591.5) 1469,-1462 1469,-1383.65 1667.65,-1185 P2.19
PA11: P2.18 U1.44 | length 1072.8
  Top Layer w10: U1.44 1255.95,-1513.51 v1(1305.31,-1562.88)
  Bottom Layer w10: v1(1305.31,-1562.88) 1338.43,-1562.88 1453,-1448.31 1453,-1341 1750,-1044 1874,-1044 P2.18
PA12: P2.17 U1.45 | length 872.6
  Top Layer w10: U1.45 1275.63,-1362.5 1291.13,-1347 1356.48,-1347 1396.48,-1387 v1(1531,-1387)
  Bottom Layer w10: v1(1531,-1387) 1692,-1226 1842.5,-1226 1856,-1212.5 1856,-1126 P2.17
PA13: J2.1 P2.16 U1.46 | length 2729.5
  Top Layer w10: v1(1292,-1483) v1@1295.32,-1479.68 ; U1.46 v1@1295.32,-1479.68 ; v1(1328.31,-1535) 1295.32,-1502.01 v1@1295.32,-1479.68
  Bottom Layer w10: J2.1 1108.87,-1915 1133.87,-1940 1617.63,-1940 1645.13,-1912.5 1645.13,-1812.5 1625.26,-1792.63 1371.09,-1792.63 1217.96,-1639.5 1217.96,-1562.49 1292,-1488.45 v1(1292,-1483) ; v1(1328.31,-1535) 1437,-1426.31 1437,-1326 1737,-1026 1874,-1026 P2.16
PA14: J2.3 P2.13 U1.49 | length 4230.9
  Top Layer w10: v1(1246,-1906) 1681.19,-1906 1724.69,-1862.5 1724.69,-1812.75 1798.44,-1739 1942,-1739 1956,-1725 1956,-962.5 1937.5,-944 1874,-944 P2.13 1856,-844 1856,-462.5 1837.5,-444 1816,-444 1782,-410 1750,-410 1737.56,-422.44 1737.56,-554.56 1757.5,-574.5 1757.5,-1115.64 1536.88,-1336.26 U1.49
  Bottom Layer w10: J2.3 580,-1870 976.5,-1870 1002.79,-1896.29 1122.16,-1896.29 1149.87,-1924 1228,-1924 v1(1246,-1906)
PA15: P2.12 U1.50 | length 978.7
  Top Layer w10: U1.50 1523.43,-1316.57 1708,-1132 1708,-902 1732.33,-877.67 v1(1732.33,-737)
  Bottom Layer w10: v1(1732.33,-737) 1867,-737 P2.12
PB0: P1.20 U1.26 | length 809.4
  Top Layer w10: P1.20 198.15,-1218.15 U1.26
PB1: P1.21 U1.27 | length 915.2
  Top Layer w10: P1.21 112.17,-1237.83 U1.27
PB3: P2.7 U1.55 | length 860.5
  Top Layer w10: U1.55 1462.03,-1218.15 1614.41,-1065.77 1614.41,-795.44 1734.5,-675.35 v1(1734.5,-610)
  Bottom Layer w10: v1(1734.5,-610) 1759.5,-585 P2.7
PB4: P2.6 U1.56 | length 1008.5
  Top Layer w10: U1.56 1456.41,-1198.46 1578.88,-1075.99 1578.88,-792.62 v1(1700,-671.5)
  Bottom Layer w10: v1(1700,-671.5) 1712,-671.5 1757.5,-626 1851.5,-626 1865,-612.5 1865,-535 P2.6
PB5: P2.5 U1.57 | length 893
  Top Layer w10: U1.57 1451.95,-1178.78 1554.93,-1075.8 1554.93,-768.79 1676.38,-647.34 1693.93,-647.34 v1(1711.5,-629.77)
  Bottom Layer w10: v1(1711.5,-629.77) 1711.5,-588.5 P2.5
PB6: P2.4 U1.58 | length 1034.6
  Top Layer w10: U1.58 1445.91,-1159.09 1537.64,-1067.36 1537.64,-756.26 v1(1677,-616.91)
  Bottom Layer w10: v1(1677,-616.91) 1677,-565.5 1816.5,-426 1874,-426 P2.4
PB7: P2.3 U1.59 | length 983.2
  Top Layer w10: U1.59 1441.16,-1139.41 1518.3,-1062.26 1518.3,-751.18 1637.42,-632.07 1637.42,-619.09 1721.06,-535.45 1721.06,-400 1736.06,-385 P2.3
PB8: P2.2 U1.61 | length 1144.1
  Top Layer w10: U1.61 1448,-1100.04 1501.21,-1046.83 1501.21,-745.65 1621.42,-625.44 1621.42,-609.78 1705.06,-526.14 1705.06,-362.5 1724.56,-343 1897,-343 1915,-325 P2.2
PB9: P2.1 U1.62 | length 1460.4
  Top Layer w10: v1(1241,-285) 1241,-606 1369,-734 1369,-1069.35 1380,-1080.35 U1.62
  Bottom Layer w10: v1(1241,-285) P2.1
PB10: P1.22 U1.29 | length 798.9
  Top Layer w10: P1.22 840,-1285 847.8,-1277.2 U1.29
PB11: P1.23 U1.30 | length 943.3
  Top Layer w10: P1.23 101,-1349 101,-1330 102,-1329 823,-1329 855.11,-1296.89 U1.30
PB12: P1.24 U1.33 | length 921.3
  Top Layer w10: P1.24 179.37,-1370.63 1033.55,-1370.63 1039.41,-1376.49 U1.33
PB13: P2.28 R4.2 U1.34 | length 1764.5
  Top Layer w10: v1(999,-1853) 999,-1509.1 1059.1,-1449 U1.34 ; v1(1610,-1581) 1610,-1730 1617.99,-1737.99 1634.43,-1737.99 1640.29,-1743.85 1640.29,-1818.71 1634.68,-1824.32 1622.68,-1824.32 v1(1620,-1827)
  Bottom Layer w10: v1(999,-1853) 1026.29,-1880.29 1138.16,-1880.29 1165.87,-1908 1211,-1908 1238.71,-1880.29 1566.71,-1880.29 v1(1620,-1827) ; v1(1610,-1581) 1742.5,-1581 1787.5,-1626 1874,-1626 P2.28
PB14: P2.27 U1.35 | length 1370.1
  Top Layer w10: U1.35 1078.78,-1453 1052.47,-1479.31 1052.47,-1738.47 1166,-1852 1533,-1852 1563,-1882 1672.94,-1882 1688.29,-1866.65 1688.29,-1711.71 P2.27
PB15: P2.26 U1.36 | length 1250.9
  Top Layer w10: U1.36 1098.47,-1658.47 1136.69,-1696.69 v1(1330,-1696.69) ; v1(1735,-1715) 1737.68,-1712.32 1737.68,-1687.32 1785,-1640 1830,-1640 1870,-1600 1870,-1530 P2.26
  Bottom Layer w10: v1(1330,-1696.69) 1368.31,-1735 1715,-1735 v1(1735,-1715)
PC0: P1.6 U1.8 | length 1326.7
  Top Layer w10: v1(1026.34,-812.84) 1076.5,-863 1156,-863 1196.89,-903.89 U1.8
  Bottom Layer w10: P1.6 241,-409 622.5,-409 v1(1026.34,-812.84)
PC1: P1.7 U1.9 | length 1674.2
  Top Layer w10: P1.7 108.47,-541.53 108.47,-445 125,-428.47 252.97,-428.47 300,-475.5 300,-795.5 312.5,-808 951.5,-808 1022.5,-879 1148.67,-879 1177.21,-907.54 U1.9
PC2: P1.8 U1.10 | length 1308.6
  Top Layer w10: v1(618,-859) 654,-895 1136.83,-895 1157.52,-915.69 U1.10
  Bottom Layer w10: P1.8 279.78,-699.78 572.78,-699.78 590.56,-682 619.53,-682 634,-696.47 634,-791.63 618,-807.63 v1(618,-859)
PC3: P1.9 U1.11 | length 1684.7
  Top Layer w10: P1.9 124.47,-625.53 124.47,-457.5 137.5,-444.47 186.47,-444.47 271,-529 271,-835 347,-911 1080.23,-911 1088.13,-918.9 1128.74,-918.9 1137.83,-928 U1.11
PC4: P1.18 U1.24 | length 834.5
  Top Layer w10: v1(322,-1139) 334,-1151 575,-1151 602.78,-1178.78 U1.24
  Bottom Layer w10: P1.18 268,-1085 v1(322,-1139)
PC5: P1.19 U1.25 | length 937.3
  Top Layer w10: P1.19 108.47,-1141.53 269.53,-1141.53 295,-1167 558.5,-1167 589.96,-1198.46 U1.25
PC6: P2.25 U1.37 | length 1322.6
  Top Layer w10: U1.37 1118.15,-1626.2 1121.08,-1629.13 1165.64,-1673.69 1358.44,-1673.69 1462.5,-1777.75 1462.5,-1823.5 1475,-1836 1549,-1836 1579,-1866 1656.94,-1866 1672.29,-1850.65 1672.29,-1627.71 P2.25
PC7: P2.24 U1.38 | length 1441.7
  Top Layer w10: U1.38 1139,-1434.9 1139,-1623.2 1172.02,-1656.22 1363.6,-1656.22 1488,-1780.63 1488,-1813 1495,-1820 1577.5,-1820 1607.5,-1850 1640.94,-1850 1656.29,-1834.65 1656.29,-1575.21 1787.5,-1444 1856,-1444 P2.24
PC8: P2.23 U1.39 | length 1168.6
  Top Layer w10: U1.39 1157.52,-1618.63 1179.12,-1640.22 1370.22,-1640.22 1485,-1755 1564.14,-1755 1570,-1749.14 1570,-1582.21 1767.21,-1385 P2.23
PC9: P2.22 U1.40 | length 846.4
  Top Layer w10: U1.40 1177.21,-1362.5 1208.71,-1331 1363.11,-1331 1392.11,-1360 1601.7,-1360 1626.7,-1335 1865,-1335 P2.22
PC10: P2.11 U1.51 | length 764.5
  Top Layer w10: U1.51 1499.73,-1296.89 1675.5,-1121.12 v1(1675.5,-863.5)
  Bottom Layer w10: v1(1675.5,-863.5) 1754,-785 P2.11
PC11: P2.10 U1.52 | length 989.4
  Top Layer w10: U1.52 1468.89,-1277.2 1651,-1095.1 1651,-831.01 1652,-830.01 1665.99,-830.01 v1(1686,-810)
  Bottom Layer w10: v1(1686,-810) 1686,-718 1700,-704 1727.5,-704 1787.5,-644 1874,-644 P2.10
PC12: P2.9 U1.53 | length 2536.9
  Top Layer w10: v1(1215,-390) 1217.06,-392.06 1217.06,-734.06 1353,-870 1353,-1053 1305,-1101 1305,-1237.52 1325,-1257.52 U1.53
  Bottom Layer w10: v1(1215,-390) 1215,-265.5 1236.5,-244 1937.5,-244 1956,-262.5 1956,-712.5 1942.5,-726 1887.5,-726 1846.5,-685 P2.9
PC13: P1.3 U1.2 | length 1808.5
  Top Layer w10: v1(1118.73,-659.06) 1315,-855.33 U1.2
  Bottom Layer w10: P1.3 24,-344 24,-245 25,-244 443,-244 465,-266 725.67,-266 v1(1118.73,-659.06)
PC14: P1.4 U1.3 | length 1408
  Top Layer w10: v1(1008,-742) 1140.95,-742 1295.32,-896.37 U1.3
  Bottom Layer w10: P1.4 651,-385 v1(1008,-742)
PC15: P1.5 U1.4 | length 1602.4
  Top Layer w10: v1(1132.5,-785.5) 1149.39,-785.5 1275.63,-911.74 U1.4
  Bottom Layer w10: P1.5 106,-444 106,-362.5 124.5,-344 666,-344 1107.5,-785.5 v1(1132.5,-785.5)
PD0: C7.2 P2.15 U1.5 Y1.2 | length 2209
  Top Layer w10: Y1.2 901,-730 ; v1(1067,-458) 1015,-510 C7.2 950,-544.85 935.85,-559 935.85,-712.5 918.35,-730 901,-730 ; U1.5 1255.95,-917.32 1169.63,-831 1136,-831 1070,-765 936,-765 901,-730
  Bottom Layer w10: v1(1067,-458) 1637.5,-458 1651,-471.5 1651,-873.16 1762.84,-985 P2.15
PD1: C12.2 P2.14 U1.6 Y1.1 | length 3454.5
  Top Layer w10: Y1.1 502.81,-730.34 559.97,-787.5 607.5,-787.5 645,-750 ; C12.2@724.96,-520.59 724.96,-643.04 645,-723 645,-752.55 673.45,-781 1050,-781 1116,-847 1163,-847 1236.26,-920.26 U1.6 ; C12.2 724.41,-520.59 727.16,-523.34 747.36,-523.34 748.31,-524.29 748.31,-528.31 775,-555 905,-555 919,-541 v1(919,-419) ; v1(1870,-320) 1869.14,-319.14 1869.14,-262.36 1887.5,-244 1937.5,-244 1956,-262.5 1956,-425.5 1937.5,-444 1887.5,-444 1874,-457.5 1874,-844 P2.14
  Bottom Layer w10: v1(919,-419) 1203.53,-419 1207.53,-423 1300,-423 1392,-331 1855.21,-331 1866.21,-320 v1(1870,-320)
PD2: P2.8 U1.54 | length 1228.9
  Top Layer w10: U1.54 1474.05,-1237.83 1633,-1078.88 1633,-811.76 1657.76,-787 1696,-787 1709,-800 v1(1709,-864) ; P2.8 1956,-626 1956,-826 v1(1951,-831)
  Bottom Layer w10: v1(1709,-864) 1742,-831 v1(1951,-831)
RESET: C4.1 D5.1 R1.1 S1.1 U1.7 | length 1832
  Top Layer w10: v1(1035,-1275) 1037,-1275 1216.58,-1095.42 U1.7 ; v1(1075.47,-1490.5) 1076,-1491.03 1076,-1733.33 1077,-1734.33 1105,-1734.33 1306.67,-1734.33 ; v1(1291,-1799) 1291,-1750 1306.67,-1734.33 ; S1.1@1360.9,-1734.33 1306.67,-1734.33
  Bottom Layer w10: v1(1035,-1275) 990.5,-1230.5 812.5,-1230.5 795,-1248 795,-1375.49 D5.1 960.99,-1375.49 1075.47,-1489.97 v1(1075.47,-1490.5) ; C4.1 1265,-1825 ; R1.1 1265,-1808 1265,-1825 ; v1(1291,-1799) 1265,-1825
RTS: Q2.2 R6.1 U2.14 | length 895.6
  Bottom Layer w10: R6.1 450.21,-1275.86 456.07,-1270 621.14,-1270 627,-1275.86 627,-1340 665,-1378 ; Q2.2 665,-1378 ; U2.14 660,-925 659,-926 659,-1136 688,-1165 688,-1355 665,-1378
pads on no net: J1.4 U2.9 U2.10 U2.11 U2.12 U2.15

## Polygon pours and split planes (outlines as drawn)
GND on Bottom Layer "GND_L02_P001" (solid, remove dead copper, pour order 1): 1975,-1970 1975,0 5,0 5,-1970
GND on Top Layer "GND_L01_P000" (solid, remove dead copper, pour order 0): 5,0 5,-1970 1925,-1970 1975,-1920 1975,0

## Silkscreen, mask and mechanical layers (free items; w line width, h text height)
Top Overlay:
  text "B9" at 1710,-269.63 h33
  text "5V" at 234.12,-296.02 h33
  text "5V" at 284.12,-296.02 h33
  text "B8" at 1730,-304.63 h33
  text "B7" at 1710,-375 h33
  text "C13" at 230,-389.63 h33
  text "C14" at 290,-389.63 h33
  text "B6" at 1730,-404.63 h33
  text "C15" at 230,-494.63 h33
  text "C0" at 290,-494.63 h33
  text "B5" at 1660,-504.63 h33
  text "B4" at 1715,-505 h33
  text "B3" at 1655,-589.63 h33
  text "D2" at 1715,-590 h33
  text "C1" at 225,-594.63 h33
  text "C2" at 275,-594.63 h33
  text "C3" at 230,-689.63 h33
  text "A0" at 275,-689.63 h33
  text "C12" at 1635,-714.63 h33
  text "C11" at 1700,-714.63 h33
  text "C10" at 1625,-789.63 h33
  text "A15" at 1702.5,-793.13 h33
  text "A1" at 225,-800 h33
  text "A2" at 275,-800 h33
  text "A3" at 225,-894.63 h33
  text "A4" at 275,-895 h33
  text "A14" at 1640,-910 h33
  text "D1" at 1710,-915 h33
  text "D0" at 1645,-989.63 h33
  text "A13" at 1695,-989.63 h33
  text "A5" at 230,-994.63 h33
  text "A6" at 280,-994.63 h33
  text "A12" at 1640,-1090 h33
  text "A11" at 1700,-1090 h33
  text "A7" at 230,-1095 h33
  text "C4" at 280,-1094.63 h33
  text "COPYRIGHT: FUXI ROBOTICS / AUTHOR: JCAI" at 360,-1170 h40
  text "C5" at 230,-1189.63 h33
  text "B0" at 280,-1189.63 h33
  text "A10" at 1645,-1194.63 h33
  text "A9" at 1705,-1194.63 h33
  text "B1" at 235,-1295 h33
  text "B10" at 285,-1294.63 h33
  text "A8" at 1650,-1294.63 h33
  text "C9" at 1700,-1294.63 h33
  text "B11" at 229.99,-1395.09 h33
  text "B12" at 285,-1395 h33
  text "C8" at 1645,-1394.63 h33
  text "C7" at 1695,-1394.63 h33
  text "GND" at 215,-1489.63 h33
  text "3V3" at 290,-1489.63 h33
  text "C6" at 1642.31,-1493.58 h33
  text "B15" at 1692.31,-1493.58 h33
  text "USERLED=B13" at 1340,-1539.56 h40
  text "GND" at 220,-1574.63 h33
  text "3V3" at 290,-1574.63 h33
  text "B14" at 1645,-1595 h33
  text "B13" at 1700,-1594.63 h33
  text "GND" at 230,-1689.63 h33
  text "3V3" at 300,-1689.63 h33
  text "5V" at 1655,-1689.63 h33
  text "5V" at 1700,-1689.63 h33
  text "3V3" at 410,-1844.67 h30
  text "SWCLK" at 490,-1844.67 h30
  text "GND" at 610,-1844.67 h30
  text "SWDIO" at 710,-1844.67 h30
  text "SWD" at 805,-1934.33 h60
Bottom Overlay:
  text "5V" at 240,-294.63 h33
  text "5V" at 300,-294.63 h33
  text "B9" at 1715,-299.63 h33
  text "B8" at 1765,-299.63 h33
  text "C13" at 255,-394.63 h33
  text "C14" at 315,-394.63 h33
  text "B7" at 1700,-410 h33
  text "B6" at 1750,-409.63 h33
  text "C15" at 255,-489.63 h33
  text "C0" at 315,-489.63 h33
  text "B5" at 1705,-504.63 h33
  text "B4" at 1755,-505 h33
  text "B3" at 1715,-584.63 h33
  text "D2" at 1760,-585 h33
  text "C1" at 245,-594.63 h33
  text "C2" at 295,-594.63 h33
  text "C3" at 245,-694.63 h33
  text "A0" at 295,-694.63 h33
  text "C12" at 1710,-714.63 h33
  text "C11" at 1765,-714.63 h33
  text "C10" at 1690,-779.63 h33
  text "A15" at 1755,-784.63 h33
  text "A1" at 245,-790 h33
  text "A2" at 290,-790 h33
  text "A3" at 245,-889.63 h33
  text "A4" at 289.87,-889.87 h33
  text "A14" at 1720,-910 h33
  text "D1" at 1760,-910 h33
  text "A5" at 245,-989.63 h33
  text "A6" at 290,-989.63 h33
  text "D0" at 1690,-989.63 h33
  text "A13" at 1760,-989.63 h33
  text "A12" at 1715,-1090 h33
  text "A11" at 1760,-1090 h33
  text "C4" at 299.2,-1098.83 h33
  text "A7" at 245,-1100 h33
  text "C5" at 250,-1189.63 h33
  text "B0" at 295,-1189.63 h33
  text "A10" at 1710,-1194.63 h33
  text "A9" at 1760,-1194.63 h33
  text "B1" at 240,-1290 h33
  text "B10" at 305,-1289.63 h33
  text "A8" at 1710,-1289.63 h33
  text "C9" at 1765,-1289.63 h33
  text "B11" at 245,-1380 h33
  text "B12" at 310,-1380 h33
  text "C8" at 1715,-1394.63 h33
  text "C7" at 1765,-1394.63 h33
  text "GND" at 253.28,-1485.25 h33
  text "3V3" at 315,-1484.63 h33
  text "C6" at 1705,-1494.63 h33
  text "B15" at 1765,-1494.63 h33
  text "GND" at 253.28,-1570.25 h33
  text "3V3" at 325,-1570 h33
  text "B14" at 1705,-1595 h33
  text "B13" at 1765,-1594.63 h33
  text "GND" at 263.28,-1685.25 h33
  text "3V3" at 325,-1684.63 h33
  text "5V" at 1710,-1689.63 h33
  text "5V" at 1765,-1689.63 h33
Mechanical 4:
  the board outline again, w10

## Text inside footprints (layer, text, board x,y; h text height)
J1: Top Overlay "USB" at 650.59,-100 h32 r180